# Altium PCB NodeCardWithCan.PcbDoc
Units mm, origin at the board's own origin, x right, y up, seen from the top; angles counter-clockwise.
Board outline 199.06 x 48.59 mm, 8 copper layers (Top Layer, Internal Plane 1, Internal Plane 2, Internal Plane 3, Internal Plane 4, Internal Plane 5, Internal Plane 6, Bottom Layer), stack 0.605 mm thick; 93 components, 51 nets, 320 pads, 30 vias.
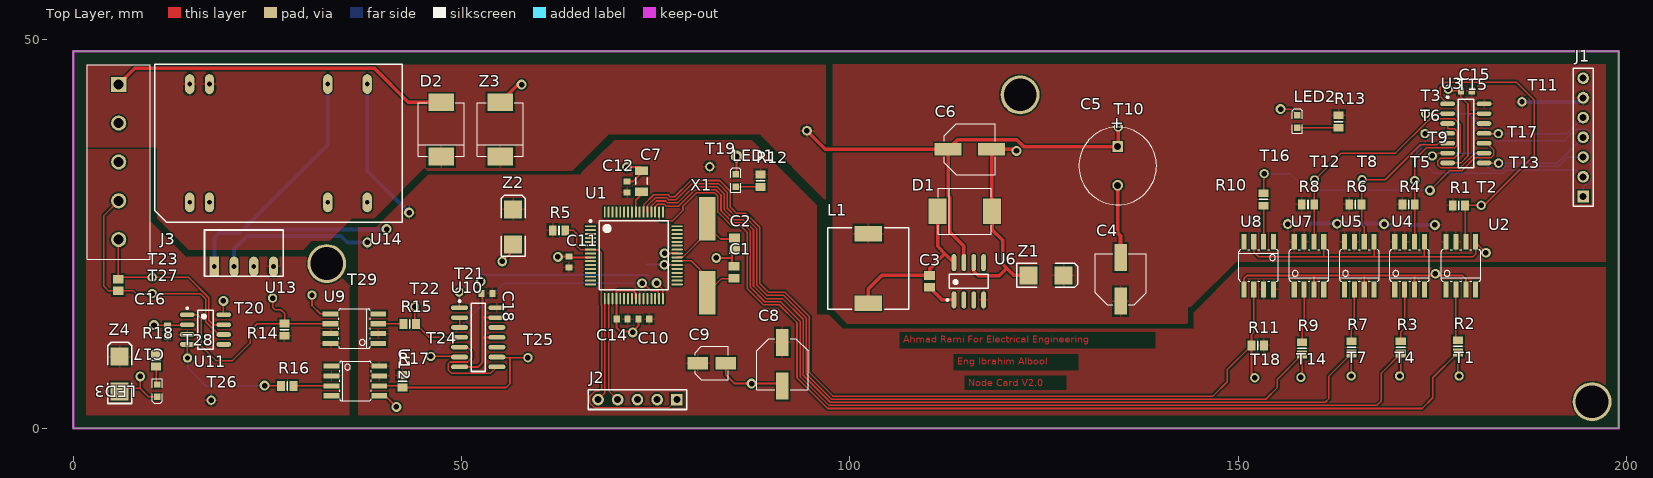
[diagram p0: Top Layer view]
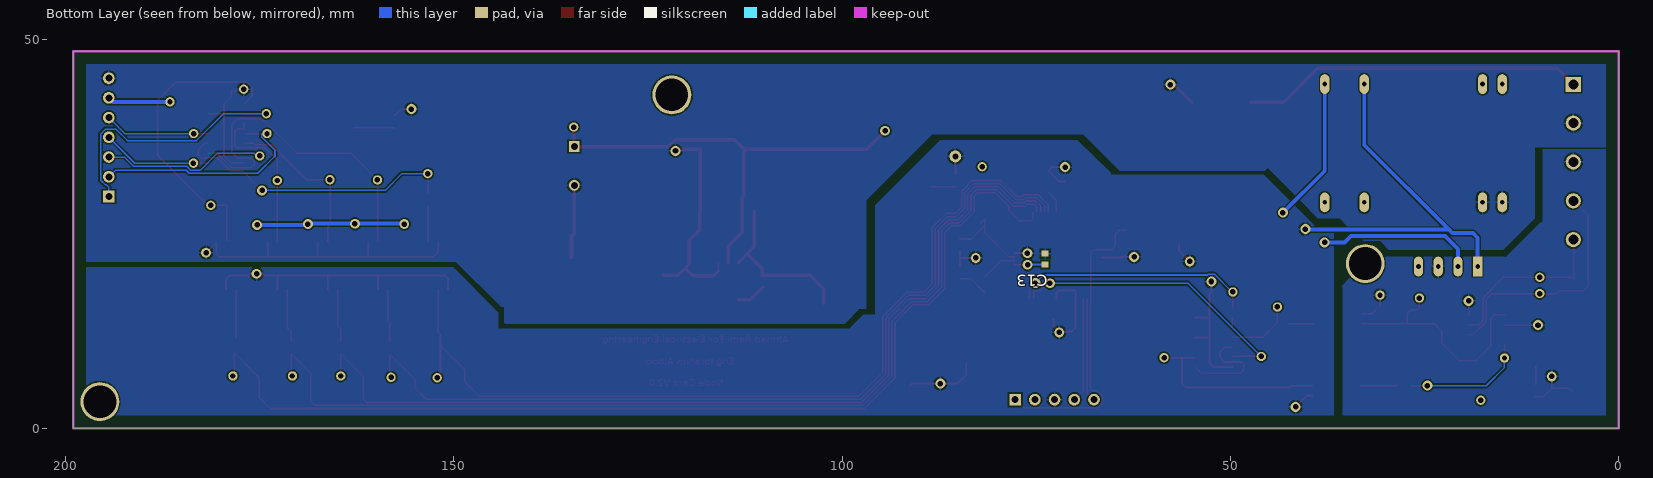
[diagram p1: Bottom Layer view, seen from below]
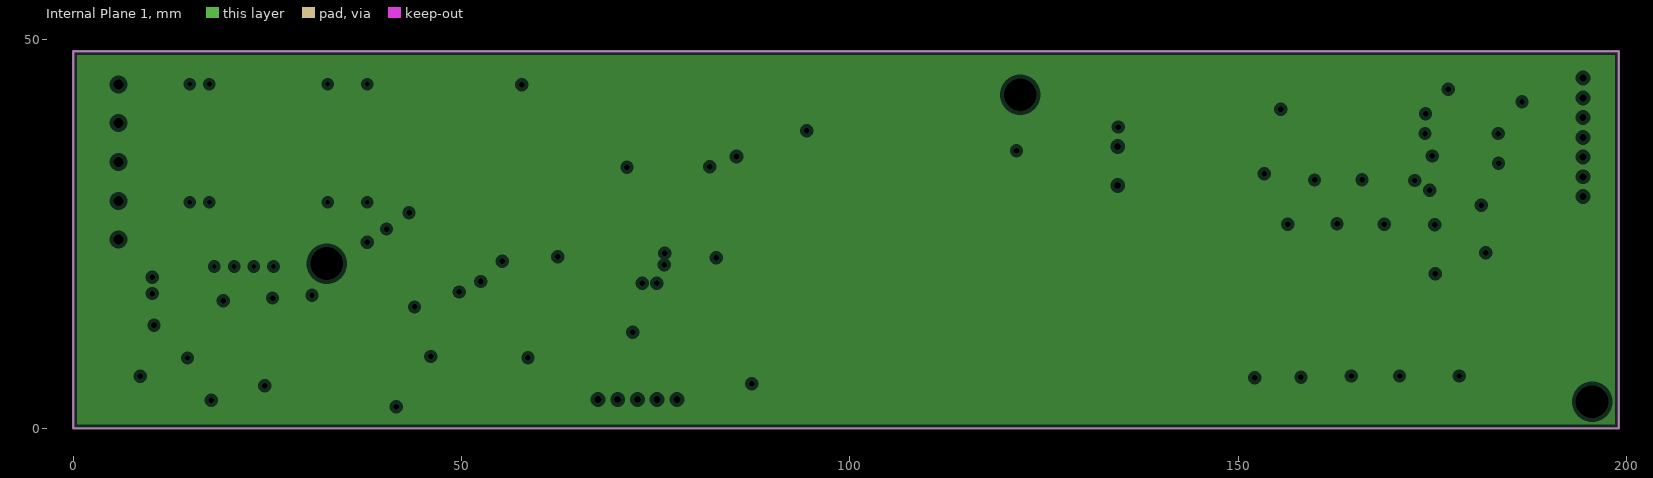
[diagram p2: Internal Plane 1, clearances drawn from the general rule]
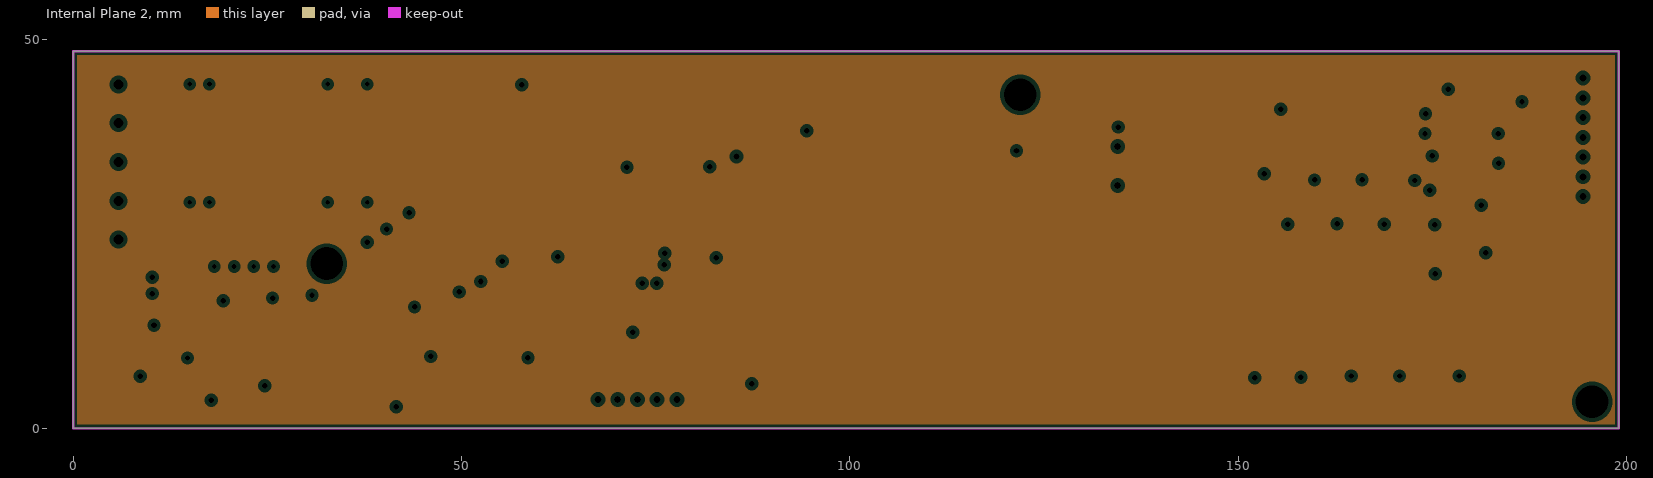
[diagram p3: Internal Plane 2, clearances drawn from the general rule]
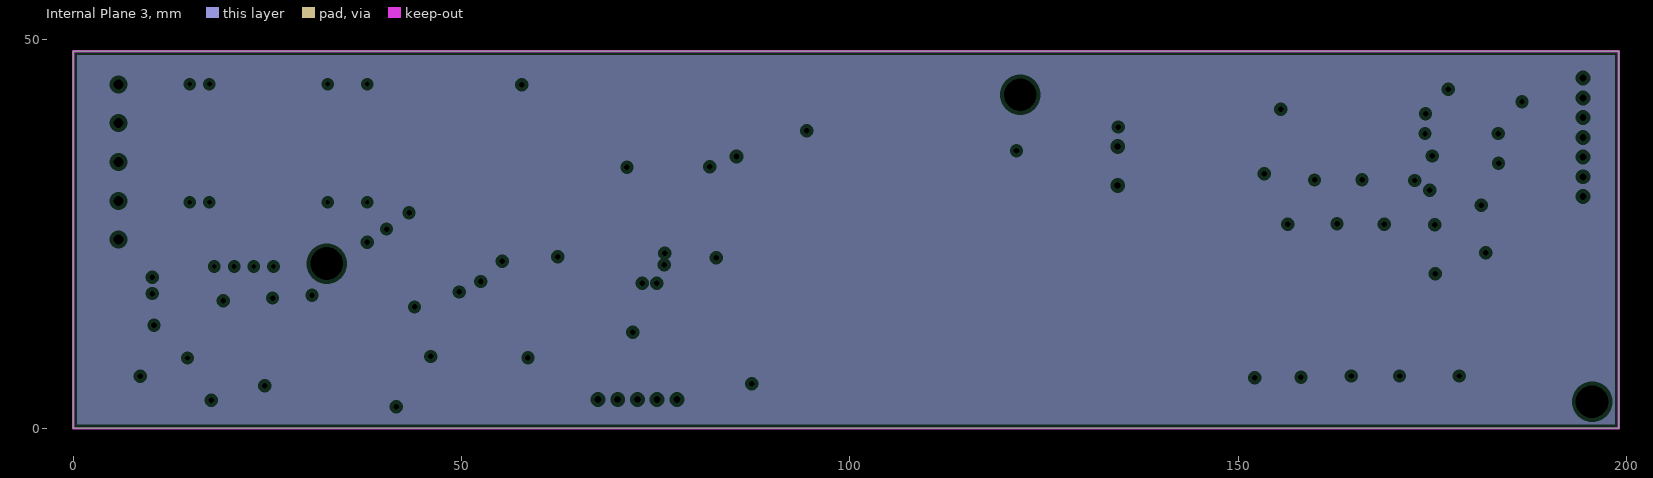
[diagram p4: Internal Plane 3, clearances drawn from the general rule]
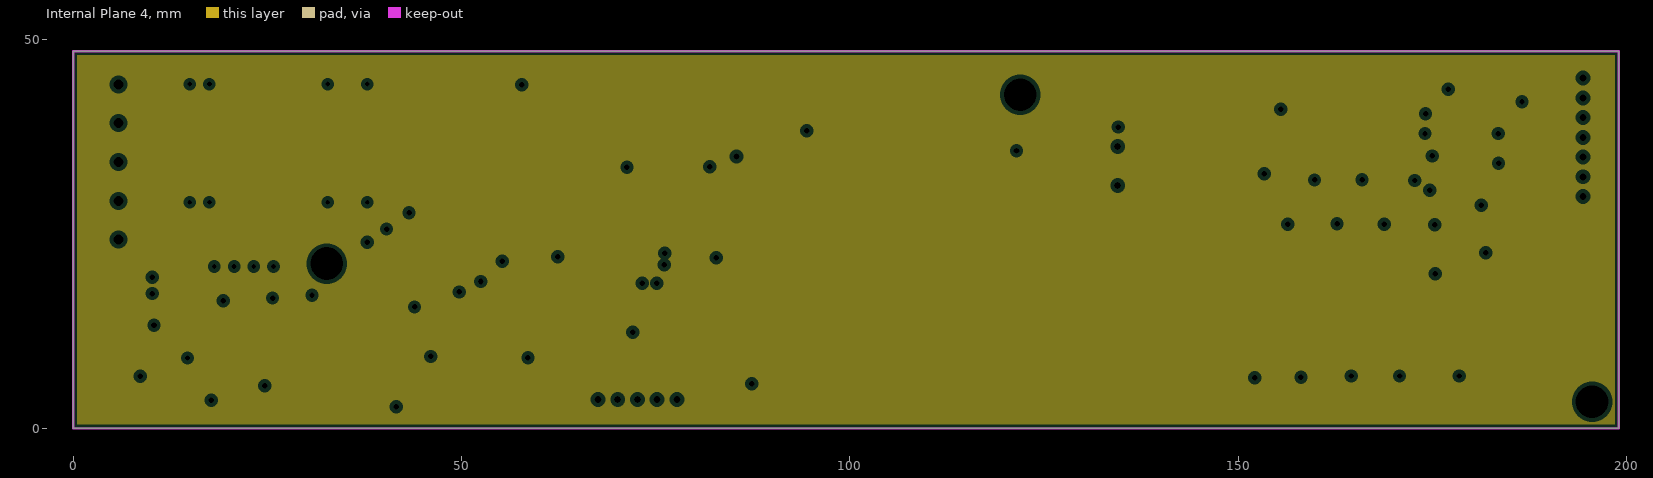
[diagram p5: Internal Plane 4, clearances drawn from the general rule]
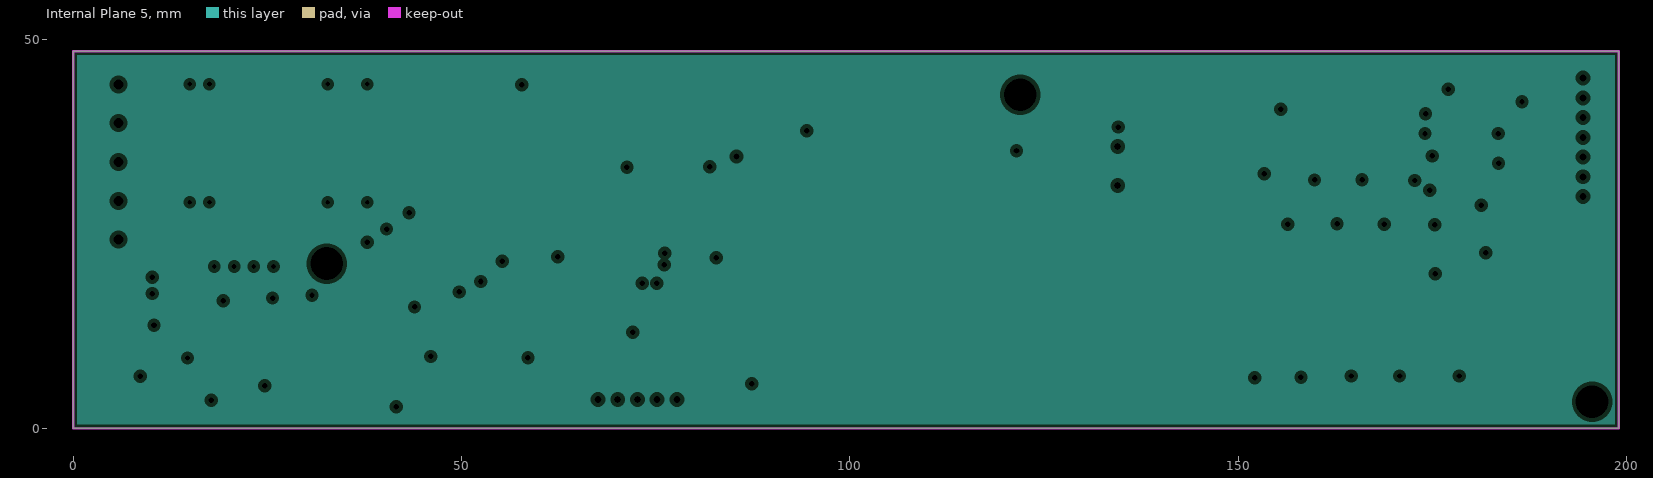
[diagram p6: Internal Plane 5, clearances drawn from the general rule]
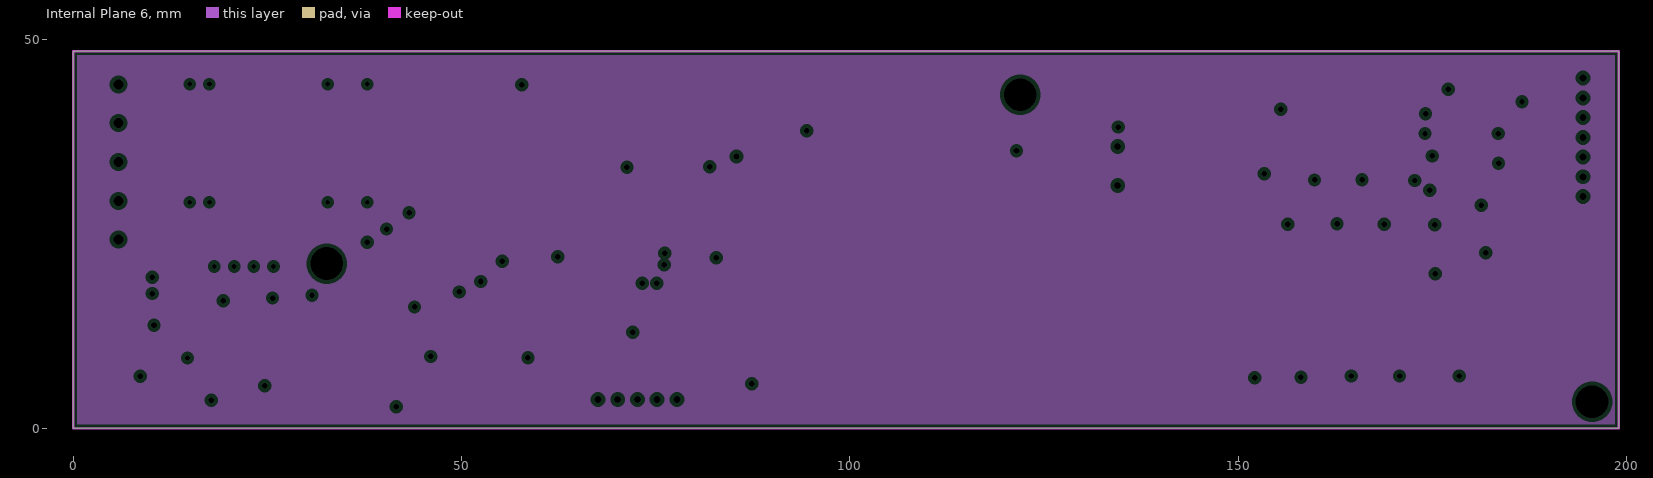
[diagram p7: Internal Plane 6, clearances drawn from the general rule]

## Layer stack, top to bottom
Top Solder: solder mask 0.0102, Solder Resist, Dk 3.5
Top Layer: signal copper 0.0356
Internal Plane 1: plane copper 0.0356
Internal Plane 2: plane copper 0.0356
Internal Plane 3: plane copper 0.0356
Internal Plane 4: plane copper 0.0356
Internal Plane 5: plane copper 0.0356
Internal Plane 6: plane copper 0.0356
Dielectric 1: dielectric 0.32, FR-4, Dk 4.8
Bottom Layer: signal copper 0.0356
Bottom Solder: solder mask 0.0102, Solder Resist, Dk 3.5

## Board outline
-0.025,-0.025 -0.025,48.565 199.034,48.565 199.034,-0.025

## Design rules (kind name [scope] priority, off if disabled: settings)
Clearance [All] p1: gap=0.2
PlaneClearance [All] p1: clearance=0.508
PlaneConnect [All] p1: planeconnectstyle=Relief reliefexpansion=0.508 reliefentries=4 reliefconductorwidth=0.254 reliefairgap=0.254
PolygonConnect [All] p1: connectstyle=Relief reliefconductorwidth=0.254 reliefentries=4 polygonreliefangle="90 Angle" airgapwidth=0.254
RoutingVias [All] p1: holewidth=0.4 width=0.7 viastyle="Through Hole" minholewidth=0.2 minwidth=0.5 maxholewidth=0.4 maxwidth=0.7
SolderMaskExpansion [All] p1: expansion=0.127
Width Power_Width [(InNet('CTRLGND') OR InNet('CTRLVCC+3.3') OR InNet('INPUTGND') OR InNet('INPUTVCC') OR InNet('MAINGND') OR InNet('MAINPOWER+24') OR InNet('OUTVCC+5'))] p1: maxlimit=1 minlimit=0.45 preferedwidth=0.45 minimp=50.000000 maximp=50.000000 favimp=50.000000
Width [All] p2: maxlimit=0.2 minlimit=0.2 preferedwidth=0.2
28 further rules are at their usual default settings.

## Components (designator, comment, footprint, x,y, rotation, side; value= is the part's Value field where it differs from the comment)
C1 "Cap" C0805 85.09,20.091 r270 top
C2 "Cap" C0805 85.141,23.749 r90 top
C3 "Cap" C0805 110.236,18.923 r90 top
C4 "100uF" "WCAP-PSLP 6.3x5.8x2.2" 134.874,19.177 r90 top
C5 "220uF" "WCAP-PTG5 10x12.5x5x0.6" 134.493,33.782 r270 top
C6 "22 μF" "WCAP-PSLP 6.3x5.8x2.2" 115.443,35.941 r0 top
C7 "Cap" C1206 73.152,31.826 r270 top
C8 "100uF" "WCAP-PSLP 6.3x5.8x2.2" 91.313,8.255 r270 top
C9 "22uF" "WCAP-PSLP 4x5.5x1" 82.22,8.382 r0 top
C10 "Cap" 1608[0603] 73.47,14.05 r0 top
C11 "Cap" 1608[0603] 63.818,21.416 r270 top
C12 "Cap" 1608[0603] 71.311,31.068 r270 top
C13 "Cap" 1608[0603] 73.851,21.79 r270 bottom
C14 "Cap" 1608[0603] 70.676,14.05 r0 top
C15 "Cap" 1608[0603] 179.4,43.434 r0 top
C16 "Cap" C0805 5.791,18.44 r90 top
C17 "Cap" 1608[0603] 12.116,12.548 r270 top
C18 "Cap" 1608[0603] 53.264,17.374 r0 top
D1 "Diode" DO-214AB_Unidirectional 114.808,27.94 r0 top
D2 "Diode" DO-214AB_Unidirectional 47.371,38.481 r90 top
J1 "Header 7" HDR1X7 194.437,29.845 r90 top
J2 "Header 5" HDR1X5 77.724,3.683 r180 top
J3 "691241710005" 691241710005 5.842,34.29 r270 top
L1 "68uH" "WE-PD 1030" 102.362,20.574 r90 top
LED1 "150060GS75000" LED_0603_Green 85.319,31.902 r90 top
LED2 "150060GS75000" LED_0603_Green 157.607,39.497 r90 top
LED3 "150060GS75000" LED_0603_Green 10.795,4.851 r270 top
R1 "Res1" 6-0805_L 178.435,28.702 r180 top
R2 "Res1" 6-0805_L 178.308,10.541 r90 top
R3 "Res1" 6-0805_L 170.942,10.414 r90 top
R4 "Res1" 6-0805_L 171.958,28.829 r180 top
R5 "Res1" 6-0805_L 62.548,25.48 r180 top
R6 "Res1" 6-0805_L 165.1,28.829 r180 top
R7 "Res1" 6-0805_L 164.592,10.414 r90 top
R8 "Res1" 6-0805_L 159.004,28.829 r180 top
R9 "Res1" 6-0805_L 158.242,10.287 r90 top
R10 "Res1" 6-0805_L 153.289,29.464 r90 top
R11 "Res1" 6-0805_L 152.527,10.668 r180 top
R12 "Res1" 6-0805_L 88.519,31.877 r90 top
R13 "Res1" 6-0805_L 162.941,39.497 r90 top
R14 "Res1" 6-0805_L 27.178,12.7 r270 top
R15 "Res1" 6-0805_L 43.332,13.411 r180 top
R16 "Res1" 6-0805_L 27.559,5.461 r180 top
R17 "Res1" 6-0805_L 42.367,6.045 r270 top
R18 "Res1" 6-0805_L 10.668,8.763 r90 top
T1 "TestPoint" "Test Point" 1440.967,1270 r0 top
T2 "TestPoint" "Test Point" 1443.812,1291.971 r0 top
T3 "TestPoint" "Test Point" 1436.649,1303.782 r0 top
T4 "TestPoint" "Test Point" 1433.297,1270 r0 top
T5 "TestPoint" "Test Point" 1435.252,1295.171 r0 top
T6 "TestPoint" "Test Point" 1436.573,1301.217 r0 top
T7 "TestPoint" "Test Point" 1427.074,1270 r0 top
T8 "TestPoint" "Test Point" 1428.471,1295.273 r0 top
T9 "TestPoint" "Test Point" 1437.51,1298.334 r0 top
T10 "TestPoint" "Test Point" -1128.7,1301.293 r90 top
T11 "TestPoint" "Test Point" 1449.07,1305.306 r0 top
T12 "TestPoint" "Test Point" -1103.427,1294.486 r90 top
T13 "TestPoint" "Test Point" -1079.729,1296.645 r90 top
T14 "TestPoint" "Test Point" -1105.179,1269.06 r90 top
T15 "TestPoint" "Test Point" -1086.206,1306.17 r90 top
T16 "TestPoint" "Test Point" -1109.904,1295.298 r90 top
T17 "TestPoint" "Test Point" -1079.754,1300.455 r90 top
T18 "TestPoint" "Test Point" -1111.123,1269.009 r90 top
T19 "TestPoint" "Test Point" -1181.303,1296.187 r90 top
T20 "TestPoint" "Test Point" -1237.615,1279.271 r90 top
T21 "TestPoint" "Test Point" 1312.189,1280.82 r0 top
T22 "TestPoint" "Test Point" -1219.327,1278.128 r90 top
T23 "TestPoint" "Test Point" -1253.109,1281.938 r90 top
T24 "TestPoint" "Test Point" -1217.244,1271.753 r90 top
T25 "TestPoint" "Test Point" -1204.722,1271.6 r90 top
T26 "TestPoint" "Test Point" -1245.514,1266.114 r90 top
T27 "TestPoint" "Test Point" -1253.109,1279.855 r90 top
T28 "TestPoint" "Test Point" -1248.562,1271.549 r90 top
T29 "TestPoint" "Test Point" -1232.535,1279.652 r90 top
U1 "DSPIC33EP512MC806-I/PT" MCHP-TQFP-PT64_N 72.183,22.263 r0 top
U2 "HCPL0601" SOIC08 178.689,20.955 r0 top
U3 "SN74HC14D" D014_L 179.324,37.973 r0 top
U4 "HCPL0601" SOIC08 172.085,20.955 r0 top
U5 "HCPL0601" SOIC08 165.608,20.955 r0 top
U6 "LM2675M-5.0/NOPB" M08A_N 115.316,18.923 r90 top
U7 "HCPL0601" SOIC08 159.131,20.955 r0 top
U8 "HCPL0601" SOIC08 152.654,20.955 r180 top
U9 "HCPL0601" SOIC08 36.195,12.827 r90 top
U10 "SN74HC14D" D014_N 52.146,11.709 r0 top
U11 "SN65HVD1050D" D8_L 17.018,12.7 r0 top
U12 "HCPL0601" SOIC08 36.322,6.096 r270 top
U13 "NKE0305SC" NKE0305SC 18.161,20.828 r90 top
U14 "TEN 3-2410N" "TRACO ISOLATED CONVERTER" 12.446,29.083 r90 top
X1 "ABLS2-8.000MHZ-D4Y-T" XTAL1140X470X330 81.649,22.204 r270 top
Z1 "Zener" SMB 125.273,19.685 r0 top
Z2 "Zener" SMB 56.642,25.933 r90 top
Z3 "36V zener" DO-214AB_Unidirectional 54.991,38.481 r90 top
Z4 "Zener" SMB 5.969,6.985 r90 top

## Footprints (in the part's own frame and the unit in brackets; to place one, negate y for a bottom-side part, rotate by r counter-clockwise, add the part's x,y. Pads: shape width x height; smd on the part's side, far side on the other; paste and mask are expansions set on the pad)
6-0805_L [mm] "Chip Resistor, Body 2.0x1.2mm, IPC High Density"
  rect 1x1.3 smd: 1(-0.8,0) 2(0.8,0)
  silkscreen extent 0,-0.55 0,0.55, body extent -1.07,-0.7 1.07,0.7, height 0.7
1608[0603] [mm] "Chip Capacitor, Body 1.6x0.8mm, IPC High Density"
  rect 0.8x0.9 smd: 1(-0.7,0) 2(0.7,0)
  body extent -0.87,-0.48 0.87,0.48, height 1.3
691241710005 [mm] "Serie 2417 - 5.00 mm _ 5 pins"
  rect 1.95x1.95 hole 1.3: 1(-10,0)
  round 1.95 hole 1.3: 2(-5,0) 3(0,0) 4(5,0) 5(10,0)
  silkscreen extent -12.5,-4.05 12.5,4.05, body extent -12.5,-4.05 12.5,4.05, height 10.1
C0805 [mm] "Chip Capacitor, Body 2.0x1.3mm, IPC High Density"
  rect 1.1x1.4 smd: 1(-0.75,0) 2(0.75,0)
  body extent -1.1,-0.72 1.1,0.72, height 1.4
C1206 [mm] "Chip Capacitor, Body 3.2x1.6mm, IPC High Density"
  rect 1.1x1.7 smd: 1(-1.35,0) 2(1.35,0)
  silkscreen extent -0.4,-0.75 0.4,0.75, body extent -1.7,-0.9 1.7,0.9, height 1.3
D8_L [mm] "SOIC, 8-Leads, Body 4.9x3.9mm, Pitch 1.27mm, IPC High Density"
  oval 1.9x0.6 smd: 1(-2.35,1.905) 2(-2.35,0.635) 3(-2.35,-0.635) 4(-2.35,-1.905) 5(2.35,-1.905) 6(2.35,-0.635) 7(2.35,0.635) 8(2.35,1.905)
  silkscreen extent -2.47,-2.5 1,2.88, body extent -2,-2.5 2,2.5, height 1.75
D014_L [mm] "SOIC, 14-Leads, Body 8.7x3.9mm, Pitch 1.27mm, IPC High Density"
  oval 1.9x0.6 smd: 1(-2.35,3.81) 2(-2.35,2.54) 3(-2.35,1.27) 4(-2.35,0) 5(-2.35,-1.27) 6(-2.35,-2.54) 7(-2.35,-3.81) 8(2.35,-3.81) 9(2.35,-2.54) 10(2.35,-1.27) 11(2.35,0) 12(2.35,1.27) 13(2.35,2.54) 14(2.35,3.81)
  silkscreen extent -2.47,-4.4 1,4.78, body extent -1.95,-4.33 1.95,4.33, height 1.75
D014_N [mm] "SOIC, 14-Leads, Body 8.7x3.9mm, Pitch 1.27mm, IPC Medium Density"
  oval 2.2x0.6 smd: 1(-2.4,3.81) 2(-2.4,2.54) 3(-2.4,1.27) 4(-2.4,0) 5(-2.4,-1.27) 6(-2.4,-2.54) 7(-2.4,-3.81) 8(2.4,-3.81) 9(2.4,-2.54) 10(2.4,-1.27) 11(2.4,0) 12(2.4,1.27) 13(2.4,2.54) 14(2.4,3.81)
  silkscreen extent -2.52,-4.4 0.9,4.78, body extent -1.95,-4.33 1.95,4.33, height 1.75
DO-214AB_Unidirectional [mm] "WE-TVSP Power TVS Diode, DO-214AB, Unidirectional"
  rect 2.3x3.3 smd: 1(-3.5,0) 2(3.5,0)
  silkscreen extent -3.43,-2.95 3.43,2.95, body extent -3.97,-2.95 3.97,2.95, height 2.5
HDR1X5 [mm] "Connector; Header; 5 Position"
  rect 1.5x1.5 hole 0.9: 1(0,0)
  round 1.5 hole 0.9: 2(2.54,0) 3(5.08,0) 4(7.62,0) 5(10.16,0)
  silkscreen extent -1.27,-1.27 11.43,1.27
HDR1X7 [mm] "Connector; Header; 7 Position"
  rect 1.5x1.5 hole 0.9: 1(0,0)
  round 1.5 hole 0.9: 2(2.54,0) 3(5.08,0) 4(7.62,0) 5(10.16,0) 6(12.7,0) 7(15.24,0)
  silkscreen extent -1.27,-1.27 16.51,1.27
LED_0603_Green [mm] "Chip LED, 2-Leads, Body 1.6x0.8mm, IPC Medium Density"
  rect 0.8x0.8 smd: 1(-0.8,0) 2(0.8,0)
  silkscreen extent -1.52,-0.64 1.65,0.64, body extent -0.8,-0.4 0.8,0.4, height 0.7
M08A_N [mm] "SOIC, 8-Leads, Body 4.9x3.9mm, Pitch 1.27mm, IPC Medium Density"
  oval 2.2x0.6 smd: 1(-2.4,1.905) 2(-2.4,0.635) 3(-2.4,-0.635) 4(-2.4,-1.905) 5(2.4,-1.905) 6(2.4,-0.635) 7(2.4,0.635) 8(2.4,1.905)
  silkscreen extent -2.52,-2.5 0.9,2.88, body extent -2,-2.5 2,2.5, height 1.75
MCHP-TQFP-PT64_N [mm] "TQFP, 64-Leads, Body 10x10mm, Pitch 0.5mm, IPC Medium Density"
  oval 1.45x0.25 smd: 1(-5.575,3.75) 2(-5.575,3.25) 3(-5.575,2.75) 4(-5.575,2.25) 5(-5.575,1.75) 6(-5.575,1.25) 7(-5.575,0.75) 8(-5.575,0.25) 9(-5.575,-0.25) 10(-5.575,-0.75) 11(-5.575,-1.25) 12(-5.575,-1.75) 13(-5.575,-2.25) 14(-5.575,-2.75) 15(-5.575,-3.25) 16(-5.575,-3.75) 33(5.575,-3.75) 34(5.575,-3.25) 35(5.575,-2.75) 36(5.575,-2.25) 37(5.575,-1.75) 38(5.575,-1.25) 39(5.575,-0.75) 40(5.575,-0.25) 41(5.575,0.25) 42(5.575,0.75) 43(5.575,1.25) 44(5.575,1.75) 45(5.575,2.25) 46(5.575,2.75) 47(5.575,3.25) 48(5.575,3.75)
  oval 0.25x1.45 smd: 17(-3.75,-5.575) 18(-3.25,-5.575) 19(-2.75,-5.575) 20(-2.25,-5.575) 21(-1.75,-5.575) 22(-1.25,-5.575) 23(-0.75,-5.575) 24(-0.25,-5.575) 25(0.25,-5.575) 26(0.75,-5.575) 27(1.25,-5.575) 28(1.75,-5.575) 29(2.25,-5.575) 30(2.75,-5.575) 31(3.25,-5.575) 32(3.75,-5.575) 49(3.75,5.575) 50(3.25,5.575) 51(2.75,5.575) 52(2.25,5.575) 53(1.75,5.575) 54(1.25,5.575) 55(0.75,5.575) 56(0.25,5.575) 57(-0.25,5.575) 58(-0.75,5.575) 59(-1.25,5.575) 60(-1.75,5.575) 61(-2.25,5.575) 62(-2.75,5.575) 63(-3.25,5.575) 64(-3.75,5.575)
  silkscreen extent -5.7,-4.45 4.45,4.55, body extent -5,-5 5,5, height 1.2
NKE0305SC [mm]
  rect 2.54x1.2 hole 0.6: 1(0,0)
  oval 2.54x1.2 hole 0.6: 2(0,-2.54) 3(0,-5.08) 4(0,-7.62)
  silkscreen extent -1.27,-8.89 4.7,1.27
SMB [mm] "DO-214-AA/SMB; 2 C-Bend Leads; Body 5.3 x 3.6 mm, inc. leads (LxW)"
  rect 2.3x2.3 smd: 1(-2.25,0) 2(2.25,0)
  silkscreen extent -3.8,-1.55 4.1,1.55
SOIC08 [mil]
  rect 26x80 smd paste-1000 mask-1000: 1(-75,-121) 2(-25,-121) 3(25,-121) 4(75,-121) 5(75,121) 6(25,121) 7(-25,121) 8(-75,121)
  silkscreen extent -100,-80 100,80
"Test Point" [mm] "Test Point"
  round 1.2 hole 0.7: 1(-1262.507,-1263.269)
"TRACO ISOLATED CONVERTER" [mm]
  oval 2.54x1.2 hole 0.6: 2(0,-2.54) 3(0,-5.08) 9(0,-20.32) 11(0,-25.4) 14(15.24,-25.4) 16(15.24,-20.32) 22(15.24,-5.08) 23(15.24,-2.54)
  silkscreen extent -2.54,-29.9 17.78,1.95
"WCAP-PSLP 4x5.5x1" [mm] "Polarized capacitors, Aluminum Polymer Capacitors, 2-Leads, Body 4x5.5x1"
  rect 2.6x1.6 smd: 1(-1.8,0) 2(1.8,0)
  silkscreen extent -2.15,-2.15 2.15,2.15, body extent -2.5,-2.15 2.5,2.15, height 5.45
"WCAP-PSLP 6.3x5.8x2.2" [mm] "Polarized capacitors, Aluminum Polymer Capacitors, 2-Leads, Body 6.3x5.8x2.2"
  rect 3.5x1.6 smd: 1(-2.8,0) 2(2.8,0)
  silkscreen extent -3.3,-3.3 3.3,3.3, body extent -3.65,-3.3 3.65,3.3, height 5.75
"WCAP-PTG5 10x12.5x5x0.6" [mm] "Polarized capacitors, Aluminum Polymer Capacitors, 2-Leads, Body 10x12.5x5x0.6"
  rect 1.4x1.4 hole 0.9: 1(-2.5,0)
  round 1.4 hole 0.9: 2(2.5,0)
  silkscreen extent -5,-5 5,5, body extent -4.96,-4.97 4.99,5, height 12.71
"WE-PD 1030" [mm] "SMD Inductor, 2-Leads, Body 10,0x10,0mm"
  rect 2x3.5 smd: 1(-4.5,0) 2(4.5,0)
  silkscreen extent -5.25,-5.2 5.25,5.2, body extent -5,-5 5,5, height 2.7
XTAL1140X470X330 [mm]
  rect 5.6x2.1 smd paste-25.4 mask-25.4: 1(-4.752,-0.001) 2(4.748,-0.001)

## Part data
C1 C2 C3 C7 C10 C11 C12 C13 C14 C15 C16 C17 C18: "Capacitor"
C4: library part "WCAP-PSLP 6.3x5.8x2.2 875105544003", "WCAP-PSLP Aluminum Polymer Capacitors , 22 µF; + / - 20%; 16 V , 6,3 x 5,8"
C5: library part "WCAP-PTG5 10x12.5x5x0.6 870025175010", "WCAP-PTG5 Aluminum Polymer Capacitors , 1000 µF; + / - 20%; 6,3 V , 10 x 12,5"
C6: library part "WCAP-PSLP 6.3x5.8x2.2 875105544003", "WCAP-PSLP Aluminum Polymer Capacitors , 22 µF; + / - 20%; 50 V , 6,3 x 5,8"
C8: library part "WCAP-PSLP 6.3x5.8x2.2 875105544003", "WCAP-PSLP Aluminum Polymer Capacitors , 22 µF; + / - 20%; 16V , 6,3 x 5,8"
C9: library part "WCAP-PSLP 4x5.5x1 875105240001", "WCAP-PSLP Aluminum Polymer Capacitors , 10 µF; + / - 20%; 10 V , 4 x 5,5"
D1 D2: "Default Diode"
J1: "Header, 7-Pin"
J2: "Header, 5-Pin"
J3: "WR-TBL Horizontal Cable Entry With Rising Cage Clamp,Serie 2417 - 5.00 mm"
L1: library part "WE-PD 1030, 7447713015", "SMD-Shielded Power Inductor WE-PD, L=1.50 µH"
LED1 LED2 LED3: library part "WL-SMCW 0603  150060GS75000", "SMD mono-color Chip LED, WL-SMCW, Green"
R1 R2 R3 R4 R5 R6 R7 R8 R9 R10 R11 R12 R13 R14 R15 R16 R17 R18: "Resistor"
T1 T2 T3 T4 T5 T6 T7 T8 T9 T10 T11 T12 T13 T14 T15 T16 T17 T18 T19 T20 T21 T22 T23 T24 T25 T26 T27 T28 T29: library part "Test Point", "Test Point"
U1: "16-Bit Microcontroller and Digital Signal Controller with High-Speed PWM, USB and Advanced Analog, 70 MIPS, 53 I/O, EPMP, -40 to 85 degC, 64-pin TQFP (PT64), Tray"
U3 U10: "Hex Schmitt-Trigger Inverter"
U6: "SIMPLE SWITCHER® Power Converter High Efficiency 1A Step-Down Voltage Regulator, 8-pin Narrow SOIC, Pb-Free"
U11: "High-Speed EMC Optimized CAN Transceiver, 70 mA, 5 V, -40 to 125 degC, 8-pin SOIC (D), Green (RoHS & no Sb/Br)"
U13: "muRata 3.3 to 5.0 isolated converter"
U14: "Traco 24/3.3 isolated converter"
Z1 Z2 Z3 Z4: library part "WE-TVSP DO-214AB, 824540102", "WE-TVSP Power TVS Diode, Unidirectional, 1500 W, 100 VDC"

## Free pads (board coordinates)
  round 5 hole 4.2: 0(32.639,21.209) 0(121.92,42.926) 0(195.58,3.429)
  round 1.524 hole 0.762: 0(85.42,35.001)

## Via types
v1: diameter 1.27, hole 0.711, Top Layer to Bottom Layer, 30 vias

## Nets (pads, with @x,y where several pads share a name; then routed paths per layer and width w, separated by ;. In a path a pad name is that pad's centre, name@x,y a point inside that pad or via, vN(x,y) a via of type N, cw(c..) or ccw(c..) an arc to the next point about the centre after c; other vN are vias at no path point)
CANH: C16.2 J3.5 T23.1 U11.7 | length 22.7
  Top Layer w0.2: C16.2 5.791,24.239 J3.5 ; C16.2@6.032,19.431 T23.1 14.834,19.431 17.45,16.815 17.45,13.894 18.009,13.335 U11.7
CANL: C16.1 J3.4 T27.1 U11.6 | length 31.5
  Top Layer w0.2: J3.4 3.937,27.385 3.937,18.287 4.533,17.69 C16.1 7.76,17.69 8.103,17.348 T27.1 16.332,17.348 17.05,16.631 17.05,13.728 18.713,12.065 U11.6
CANRX: T24.1 U1.31 U10.6 | length 38.4
  Top Layer w0.2: T24.1 49.67,9.246 U10.6 ; v1(73.254,18.669) 73.442,18.669 74.398,17.713 75.317,17.713 75.348,17.681 75.348,16.763 U1.31@75.423,16.688
  Bottom Layer w0.2: T24.1 55.448,18.669 v1(73.254,18.669)
CANTX: T21.1 U1.32 U10.1 | length 31.2
  Top Layer w0.2: T21.1 49.682,15.583 U10.1 ; v1(75.108,18.694) 75.923,17.879 U1.32@75.923,16.688
  Bottom Layer w0.2: T21.1 49.783,17.551 52.064,19.833 52.838,19.833 52.935,19.736 74.066,19.736 v1(75.108,18.694)
CLOCK: R2.1 T1.1 U1.50 | length 134.3
  Top Layer w0.2: U1.50 75.433,26.955 75.692,26.695 77.14,26.695 78.511,28.067 78.511,28.6 80.213,30.302 82.575,30.302 82.683,30.194 83.007,29.87 83.007,27.838 84.785,26.06 85.954,26.06 86.792,25.222 86.792,17.983 88.875,15.9 90.907,15.9 93.193,13.614 93.193,6.502 97.155,2.54 173.685,2.54 175.057,3.912 175.057,6.49 R2.1 178.308,6.883 T1.1
CTRLGND: C1.1 C2.1 C7.1 C8.2 C9.2 C10.1 C11.1 C12.1 C13.1 C14.1 C18.1 J2.3 LED1.2 pad.0@85.42,35.001 U1.9 U1.20 U1.25 U1.41 U2.3 U4.3 U5.3 U7.3 U8.5 U10.7 U10.11 U10.13 U12.5 U13.1 U14.16 Z2.1 | length 148.1
  Top Layer w0.254: U12.5 40.157,4.191 v1(41.605,2.743) ; U10.7 52.146,7.899 52.68,8.433 52.68,14.224 ; v1(52.451,18.898) 52.451,17.486 C18.1 52.68,17.258 52.68,14.224 ; 52.705,11.709 U10.11 ; U10.13 52.705,14.249 52.68,14.224 ; v1(55.245,21.488) 56.642,22.885 Z2.1 ; v1(62.408,22.073) 62.451,22.116 C11.1 ; C11.1@63.921,22.013 U1.9@66.598,22.013 ; U1.20@69.923,16.688 69.923,17.644 70.019,17.74 72.111,17.74 72.375,17.475 72.375,17.464 ; 69.95,15.799 U1.20@69.95,16.73 ; 69.976,15.773 C14.1 69.976,12.921 70.422,12.475 72.047,12.475 72.77,13.198 C10.1 ; v1(71.298,33.63) 73.02,33.63 73.47,33.18 72.058,31.768 C12.1 ; U1.25@72.423,16.688 72.423,17.427 ; v1(76.137,22.534) 76.899,22.534 ; 76.979,22.555 U1.41@77.775,22.555 ; v1(82.804,21.946) 84.709,21.946 ; C9.2 84.02,6.912 85.192,5.74 v1(87.351,5.74) 91.028,5.74 C8.2 ; C1.1@84.836,20.825 C2.1@84.836,22.872 ; LED1.2@85.42,32.804 pad.0@85.42,35.001 ; U8.5 150.749,19.279 151.13,19.66 159.766,19.66 ; U7.3 159.766,19.66 ; U5.3 166.243,19.609 166.294,19.66 ; U4.3 172.72,19.66 ; U2.3 179.324,19.228 178.892,19.66 172.72,19.66 ; 159.766,19.66 166.294,19.66 ; 166.294,19.66 172.72,19.66
  Bottom Layer w0.254: v1@40.259,25.578 v1(40.335,25.654)
  Bottom Layer w0.5: U13.1 18.161,24.536 18.771,25.146 21.438,25.146 21.869,25.578 ; U14.16 32.766,36.474 21.869,25.578 ; v1@40.259,25.578 21.869,25.578
  other v1: 72.047,12.348 175.412,19.888
CTRLVCC+3.3: C8.1 C9.1 C10.2 C11.2 C12.2 C13.2 C14.2 C18.2 R5.2 R11.1 R12.2 R17.1 T19.1 U1.10 U1.19 U1.26 U1.38 U1.57 U8.7 U8.8 U9.2 U10.14 U12.7 U12.8 U13.2 U14.14 Z2.2 | length 43.1
  Top Layer w0.254: v1(76.111,21.055) U1.38@77.775,21.055
  Bottom Layer w0.254: C13.2 v1@76.077,21.089
  Bottom Layer w0.5: U13.2 20.701,23.063 22.377,24.74 34.493,24.74 35.306,23.927 v1(37.871,23.927) ; U14.14 37.846,33.147 v1(43.231,27.762)
DATA_IN: R11.2 T18.1 U1.54 U8.6 | length 117.2
  Top Layer w0.2: U1.54 73.433,28.736 74.76,30.063 76.606,30.063 76.855,29.814 77.462,29.814 79.55,31.902 83.238,31.902 84.607,30.533 84.607,28.501 85.448,27.66 86.616,27.66 88.393,25.884 88.393,18.645 89.537,17.5 91.657,17.5 94.793,14.365 94.793,7.165 97.818,4.14 146.761,4.14 148.615,5.994 148.615,7.556 R11.2 ; U8.6 152.019,12.319 151.727,12.027 R11.2 ; T18.1 151.727,6.921 R11.2
DATA_OUT: R9.1 T14.1 U1.53 | length 113.7
  Top Layer w0.2: U1.53 73.933,28.67 74.925,29.663 76.44,29.663 76.689,29.414 77.628,29.414 79.716,31.502 83.072,31.502 84.207,30.367 84.207,28.335 85.282,27.26 86.451,27.26 87.992,25.719 87.992,18.48 89.372,17.1 91.491,17.1 94.393,14.199 94.393,6.999 97.652,3.74 153.549,3.74 155.067,5.258 155.067,6.312 R9.1 158.242,6.706 T14.1
INPUTGND: C17.1 J3.3 LED3.2 T29.1 U9.5 U11.2 U11.8 U13.3 Z4.1 | length 17.3
  Top Layer w0.2: Z4.1 6.365,5.131 8.611,5.131 ; v1(8.611,6.68) 8.611,5.131 ; v1(10.389,13.284) 10.425,13.248 C17.1 14.581,13.248 U11.2 ; LED3.2 9.69,4.051 8.611,5.131 ; v1(19.329,16.408) 19.329,14.644 U11.8 ; T29.1 30.734,15.799 31.801,14.732 U9.5
INPUTVCC: C17.2 R14.2 R18.2 T26.1 U9.7 U9.8 U11.3 U12.2 U13.4 Z4.2
MAINGND: C4.2 C5.2 C6.2 C15.1 D1.2 J1.7 J3.2 LED2.2 T15.1 U2.5 U3.7 U3.13 U4.5 U5.5 U6.6 U7.5 U8.3 U14.2 U14.3 Z1.1 Z3.2 | length 99
  Top Layer w0.2: 115.951,20.218 U6.6 ; U8.3 152.019,22.708 152.654,22.073 161.036,22.073 ; v1(155.473,41.097) 156.807,41.097 LED2.2 ; U7.5 161.036,22.073 ; 167.513,22.098 U5.5 ; U4.5 173.99,22.073 ; U3.7 178.689,34.163 179.603,35.077 179.603,41.758 178.7,42.661 C15.1 177.292,43.434 T15.1 ; 179.68,40.513 U3.13 ; U2.5 U2.5@180.594,23.927 ; v1(181.915,22.606) U2.5@180.594,23.927 ; 161.036,22.073 173.99,22.073 ; 173.99,22.073 180.238,22.073 180.594,22.428 U2.5@180.594,23.927
  Top Layer w0.45: Z3.2 57.257,44.247 v1(57.734,44.247) ; 115.951,20.218 116.535,19.634 119.253,19.634 120.218,20.599 ; v1@121.234,35.941 C6.2 118.243,28.005 D1.2 118.308,25.583 119.685,24.206 119.685,21.133 120.218,20.599 ; Z1.1 121.133,19.685 120.218,20.599
  Top Layer w0.5: C5.2 134.493,25.146 134.874,24.765 C4.2
  other v1: 121.463,35.712
MAINPOWER+24: C5.1 C6.1 D2.1 T10.1 U6.7 U14.22 U14.23 Z3.1 | length 59.8
  Top Layer w0.45: v1(94.463,38.303) 96.825,35.941 C6.1 ; U6.7 114.681,23.47 112.883,25.268 112.883,29.766 112.643,30.006 C6.1 ; C5.1 122.392,36.282 121.508,37.166 113.868,37.166 C6.1 ; C5.1@134.569,36.358 T10.1
NetC1_2: C1.2 U1.39 X1.2 | length 8.7
  Top Layer w0.2: U1.39@77.775,21.555 79.578,21.555 X1.2@81.647,19.486 ; X1.2 83.47,19.278 C1.2@84.883,19.278
NetC2_2: C2.2 U1.40 X1.1 | length 11.6
  Top Layer w0.2: U1.40@77.775,22.055 78.497,22.055 81.647,25.205 X1.1@81.647,26.074 ; X1.1@82.208,26.395 X1.1 X1.1@81.647,26.074 ; C2.2@84.836,24.372 83.349,24.372 X1.1@81.647,26.074
NetC3_1: C3.1 U6.1 | length 3.9
  Top Layer w0.45: C3.1 111.886,16.523 U6.1
NetC3_2: C3.2 D1.1 L1.1 U6.8 | length 21.6
  Top Layer w0.2: C3.2 C3.2@110.261,19.698
  Top Layer w0.45: L1.1 102.362,17.932 104.103,19.673 C3.2 ; C3.2@110.261,19.698 110.261,20.51 112.243,22.491 ; D1.1 111.308,23.426 112.243,22.491 ; U6.8 112.243,22.491
NetC7_2: C7.2 U1.56 | length 3.1
  Top Layer w0.2: U1.56@72.423,27.838 72.423,29.37 73.47,30.417 C7.2@73.47,30.48
NetD2_2: D2.2 J3.1 | length 44.2
  Top Layer w0.5: J3.1 7.907,46.355 38.76,46.355 43.134,41.981 D2.2
NetJ1_1: J1.1 T3.1 U3.2 | length 35.1
  Top Layer w0.2: T3.1 U3.2
  Bottom Layer w0.2: T3.1 179.677,40.513 183.142,37.048 192.045,37.048 193.513,38.515 194.872,38.515 195.487,37.9 195.487,31.95 194.872,31.335 194.708,31.335 194.437,31.064 J1.1
NetJ1_2: J1.2 T6.1 U3.4 | length 30
  Top Layer w0.2: T6.1 U3.4@176.949,37.948
  Bottom Layer w0.2: T6.1 174.766,37.948 174.766,37.536 173.036,35.806 173.036,35.06 175.259,32.838 184.079,32.838 184.476,33.235 193.587,33.235 J1.2
NetJ1_3: J1.3 T9.1 U3.6 | length 23.3
  Top Layer w0.2: T9.1 175.451,35.065 175.819,35.433 U3.6
  Bottom Layer w0.2: T9.1 175.4,35.065 175.768,35.433 180.445,35.433 182.64,33.238 183.913,33.238 184.413,33.738 191.275,33.738 192.463,34.925 J1.3
NetJ1_4: J1.4 T13.1 U3.8 | length 14.2
  Top Layer w0.2: U3.8 181.699,34.138 T13.1
  Bottom Layer w0.2: T13.1 191.11,34.138 J1.4
NetJ1_5: J1.5 T17.1 U3.11 | length 13.6
  Top Layer w0.2: U3.11 181.699,37.948 T17.1
  Bottom Layer w0.2: T17.1 192.38,37.948 J1.5
NetLED1_1: LED1.1 R12.1 | length 3.2
  Top Layer w0.2: LED1.1 R12.1@88.494,31.102
NetLED2_1: LED2.1 R13.1 | length 5.3
  Top Layer w0.2: LED2.1 R13.1
NetLED3_1: LED3.1 R18.1 | length 2.4
  Top Layer w0.2: R18.1 10.668,5.778 LED3.1
NetR1_1: R1.1 T2.1 U2.6 U3.1 | length 41.2
  Top Layer w0.2: U3.1 175.997,42.76 175.997,43.869 176.691,44.563 185.841,44.563 188.138,42.266 188.138,35.154 181.686,28.702 R1.1 ; U2.6@179.235,24.117 R1.1 ; T2.1 R1.1
NetR2_2: R2.2 U2.2 | length 6.3
  Top Layer w0.2: R2.2@178.054,11.595 U2.2
NetR3_2: R3.2 U4.2 | length 6.9
  Top Layer w0.2: R3.2 170.942,12.395 171.45,12.903 U4.2
NetR4_1: R4.1 T5.1 U3.3 U4.6 | length 20.6
  Top Layer w0.2: U4.6@172.758,24.066 R4.1 172.758,34.633 174.228,36.103 177.873,36.103 178.224,36.454 178.224,38.222 177.873,38.573 176.974,38.573 U3.3
NetR6_1: R6.1 T8.1 U3.5 U5.6 | length 21
  Top Layer w0.2: T8.1@165.9,31.94 R6.1 165.9,26.226 166.243,25.883 U5.6 ; T8.1 168.961,32.004 173.46,36.503 175.614,36.503 175.814,36.703 U3.5
NetR7_2: R7.2 U5.2 | length 6.8
  Top Layer w0.2: R7.2 164.592,12.827 164.973,13.208 U5.2
NetR8_1: R8.1 T12.1 U3.9 U7.6 | length 44.5
  Top Layer w0.2: U7.6@159.804,24.066 R8.1 159.804,31.94 T12.1 163.297,35.433 170.279,35.433 174.459,39.613 174.515,39.613 174.745,39.843 177.873,39.843 178.624,39.092 178.624,35.584 177.803,34.763 176.075,34.763 175.724,34.412 175.724,33.914 176.075,33.563 178.655,33.563 180.525,35.433 U3.9
NetR9_2: R9.2 U7.2 | length 6.9
  Top Layer w0.2: R9.2 158.242,13.564 158.496,13.818 U7.2
NetR10_1: R10.1 U8.2 | length 4.6
  Top Layer w0.2: U8.2 R10.1
NetR10_2: R10.2 T16.1 U3.10 | length 37.1
  Top Layer w0.2: R10.2 T16.1@153.289,32.715 ; v1(174.701,30.632) 177.232,33.163 178.82,33.163 180.49,34.833 182.573,34.833 182.924,35.184 182.924,35.827 182.048,36.703 U3.10
  Bottom Layer w0.2: T16.1 156.693,32.791 158.852,30.632 v1(174.701,30.632) v1@174.727,30.658
NetR14_1: R14.1 T20.1 U9.6 U11.1 | length 30.2
  Top Layer w0.2: U11.1 16.027,14.605 16.485,14.148 16.485,10.592 18.364,8.712 20.498,8.712 22.758,10.973 22.758,12.522 23.698,13.462 R14.1@27.216,13.462 ; T20.1 25.654,15.596 25.984,15.265 26.721,15.265 27.216,14.77 R14.1@27.216,13.462 ; U9.6 R14.1@27.216,13.462
NetR15_1: R15.1 T22.1 U10.4 | length 8.6
  Top Layer w0.2: T22.1 43.942,13.602 R15.1 45.834,11.709 U10.4
NetR15_2: R15.2 U9.3 | length 3.3
  Top Layer w0.2: U9.3 42.482,13.462 R15.2
NetR16_1: R16.1 U12.3 | length 4.9
  Top Layer w0.2: R16.1 U12.3
NetR16_2: R16.2 T28.1 U11.4 | length 16
  Top Layer w0.2: T28.1@14.668,9.081 U11.4 ; v1(24.638,5.486) 24.663,5.461 R16.2
  Bottom Layer w0.2: T28.1 14.707,7.823 17.043,5.486 v1(24.638,5.486)
NetR17_2: R17.2 T25.1 U10.9 U12.6 | length 24.5
  Top Layer w0.2: U12.6 42.151,5.461 R17.2 55.74,5.245 56.236,5.74 56.236,9.093 ; U10.9 54.622,9.093 56.236,9.093 ; T25.1 56.236,9.093
NetU10_2: U10.2 U10.3 | length 1.3
  Top Layer w0.2: U10.3 U10.2
NetU10_5: U10.5 U10.8 | length 13.5
  Top Layer w0.2: U10.5 50.749,10.439 51.308,9.881 51.308,9.068 50.775,8.534 48.514,8.534 48.26,8.28 48.26,7.544 48.717,7.087 53.733,7.087 U10.8
OUT_ENABLE: R7.1 T7.1 U1.52 | length 120.5
  Top Layer w0.2: U1.52 74.433,28.605 75.091,29.263 76.275,29.263 76.523,29.014 77.793,29.014 79.882,31.102 82.907,31.102 83.807,30.202 83.807,28.17 85.117,26.86 86.285,26.86 87.592,25.554 87.592,18.315 89.206,16.7 91.326,16.7 93.993,14.034 93.993,6.834 97.486,3.34 161.214,3.34 161.696,3.823 161.696,6.718 R7.1 164.592,6.756 T7.1
OUTVCC+5: C4.1 C15.2 J1.6 L1.2 R1.2 R4.2 R6.2 R8.2 R13.2 T11.1 U2.7 U2.8 U3.14 U4.7 U4.8 U5.7 U5.8 U6.4 U7.7 U7.8 Z1.2 | length 27
  Bottom Layer w0.2: J1.6@193.929,42.037 J1.6
  Bottom Layer w0.5: v1@156.489,26.391 168.961,26.391 169.164,26.187 v1(175.336,26.187) ; T11.1 J1.6@193.929,42.037
  other v1: 156.388,26.289 168.808,26.289 162.738,26.34
PGC: J2.5 U1.17 | length 13.4
  Top Layer w0.2: J2.5 68.423,4.542 U1.17@68.423,16.688
PGD: J2.4 U1.18 | length 13.5
  Top Layer w0.2: U1.18@68.923,16.688 68.923,4.864 J2.4
STROBE: R3.1 T4.1 U1.51 | length 126.7
  Top Layer w0.2: U1.51 74.933,28.539 75.257,28.863 76.109,28.863 76.358,28.614 77.959,28.614 80.048,30.702 82.741,30.702 83.407,30.036 83.407,28.004 84.951,26.46 86.119,26.46 87.192,25.388 87.192,18.149 89.04,16.3 91.072,16.3 93.593,13.78 93.593,6.668 97.321,2.94 167.843,2.94 168.453,3.55 168.453,7.125 R3.1 170.942,6.883 T4.1
VPP: J2.1 R5.1 U1.7 | length 39
  Top Layer w0.2: R5.1 64.41,25.48 64.846,25.044 64.846,23.47 65.303,23.013 66.598,23.013 67.564,23.013 67.998,22.578 67.998,15.912 68.023,15.887 68.023,5.133 67.691,4.801 67.208,4.801 67.141,4.733 67.129,4.733 66.514,4.118 66.514,3.248 67.132,2.63 67.132,2.616 76.657,2.616 J2.1
pads on no net: J2.2 U1.1 U1.2 U1.3 U1.4 U1.5 U1.6 U1.8 U1.11 U1.12 U1.13 U1.14 U1.15 U1.16 U1.21 U1.22 U1.23 U1.24 U1.27 U1.28 U1.29 U1.30 U1.33 U1.34 U1.35 U1.36 U1.37 U1.42 U1.43 U1.44 U1.45 U1.46 U1.47 U1.48 U1.49 U1.55 U1.58 U1.59 U1.60 U1.61 U1.62 U1.63 U1.64 U2.1 U2.4 U3.12 U4.1 U4.4 U5.1 U5.4 U6.2 U6.3 U6.5 U7.1 U7.4 U8.1 U8.4 U9.1 U9.4 U10.10 U10.12 U11.5 U12.1 U12.4 U14.9 U14.11

## Polygon pours and split planes (outlines as drawn)
INPUTGND on Bottom Layer "Bottom Layer-No Net" (solid, pour order 9): 1.3,1.3 1.3,35.941 9.779,35.941 9.906,36.068 9.779,35.941 9.779,26.543 10.033,26.543 14.605,21.971 14.732,22.098 30.353,22.098 31.877,22.098 35.687,18.288 35.56,18.161 35.56,1.3 1.3,1.3
CTRLGND on Bottom Layer "Bottom Layer-No Net" (solid, pour order 11): 36.703,1.3 36.703,25.908 38.989,25.908 45.212,32.131 45.72,32.639 65.405,32.639 65.405,32.893 69.723,37.084 69.85,37.084 87.249,37.084 87.376,37.084 95.631,28.829 95.758,28.702 95.758,14.605 97.282,14.605 99.06,12.827 144.272,12.827 144.272,14.859 150.114,20.701 197.7,20.701 197.7,1.3 36.83,1.3
MAINGND on Bottom Layer "Bottom Layer-No Net" (solid, pour order 14): 1.3,36.195 1.3,47.2 197.7,47.2 197.7,21.463 149.606,21.463 149.733,21.463 143.891,15.621 143.51,15.621 143.51,13.589 143.383,13.462 99.949,13.462 99.695,13.462 97.79,15.367 96.901,15.367 96.901,29.337 88.392,37.846 88.011,37.846 69.85,37.846 69.088,37.846 68.961,37.846 64.897,33.782 64.262,33.147 45.593,33.147 45.212,33.528 38.735,27.051 35.941,27.051 35.687,26.797 33.02,24.13 31.496,24.13 30.734,24.13 29.591,22.987 14.859,22.987 10.795,27.051 10.795,36.195 1.3,36.195
INPUTVCC on Top Layer "Bottom Layer-No Net" (solid, pour order 8): 1.27,1.27 1.27,35.911 9.749,35.911 9.876,36.038 9.749,35.911 9.749,26.513 10.003,26.513 14.575,21.941 14.702,22.068 30.323,22.068 31.847,22.068 35.657,18.258 35.53,18.131 35.53,1.27 1.27,1.27
MAINPOWER+24 on Top Layer "Bottom Layer-No Net" (solid, pour order 13): 1.3,36.195 1.3,46.839 96.901,46.839 96.901,35.052 96.901,31.623 96.901,29.337 88.392,37.846 88.011,37.846 69.85,37.846 69.088,37.846 68.961,37.846 64.897,33.782 64.262,33.147 45.593,33.147 45.212,33.528 38.735,27.051 35.941,27.051 35.687,26.797 33.02,24.13 31.496,24.13 30.734,24.13 29.591,22.987 14.859,22.987 10.795,27.051 10.795,36.195
OUTVCC+5 on Top Layer "Bottom Layer-No Net" (solid, pour order 12): 97.79,47.2 197.7,47.2 197.7,21.463 149.606,21.463 149.733,21.463 143.891,15.621 143.51,15.621 143.51,13.589 143.383,13.462 99.949,13.462 99.695,13.462 97.79,15.367 97.79,15.494 97.79,29.464
CTRLVCC+3.3 on Top Layer "Bottom Layer-No Net" (solid, pour order 10): 36.703,1.3 36.703,25.908 38.989,25.908 45.212,32.131 45.72,32.639 65.405,32.639 65.405,32.893 69.723,37.084 69.85,37.084 87.249,37.084 87.376,37.084 95.631,28.829 95.758,28.702 95.758,14.605 97.282,14.605 99.06,12.827 144.272,12.827 144.272,14.859 150.114,20.701 197.7,20.701 197.7,1.3 36.83,1.3

## Keep-outs
Keep-Out Layer:
  the board outline again, w0.3

## Other copper
Top Layer:
  text "Ahmad Rami For Electrical Engineering" at 106.909,11.024 h0.9
  text "Eng Ibrahim Albool" at 113.843,8.204 h0.9
  text "Node Card V2.0" at 115.265,5.436 h0.9

## Silkscreen, mask and mechanical layers (free items; w line width, h text height)
Mechanical 3:
  the board outline again, w0.1

## Text inside footprints (layer, text, board x,y; h text height)
C5: Top Overlay "+" at 133.756,40.107 h1.5 r270